# EAGLE board lpc1788_board (EAGLE 6.4)
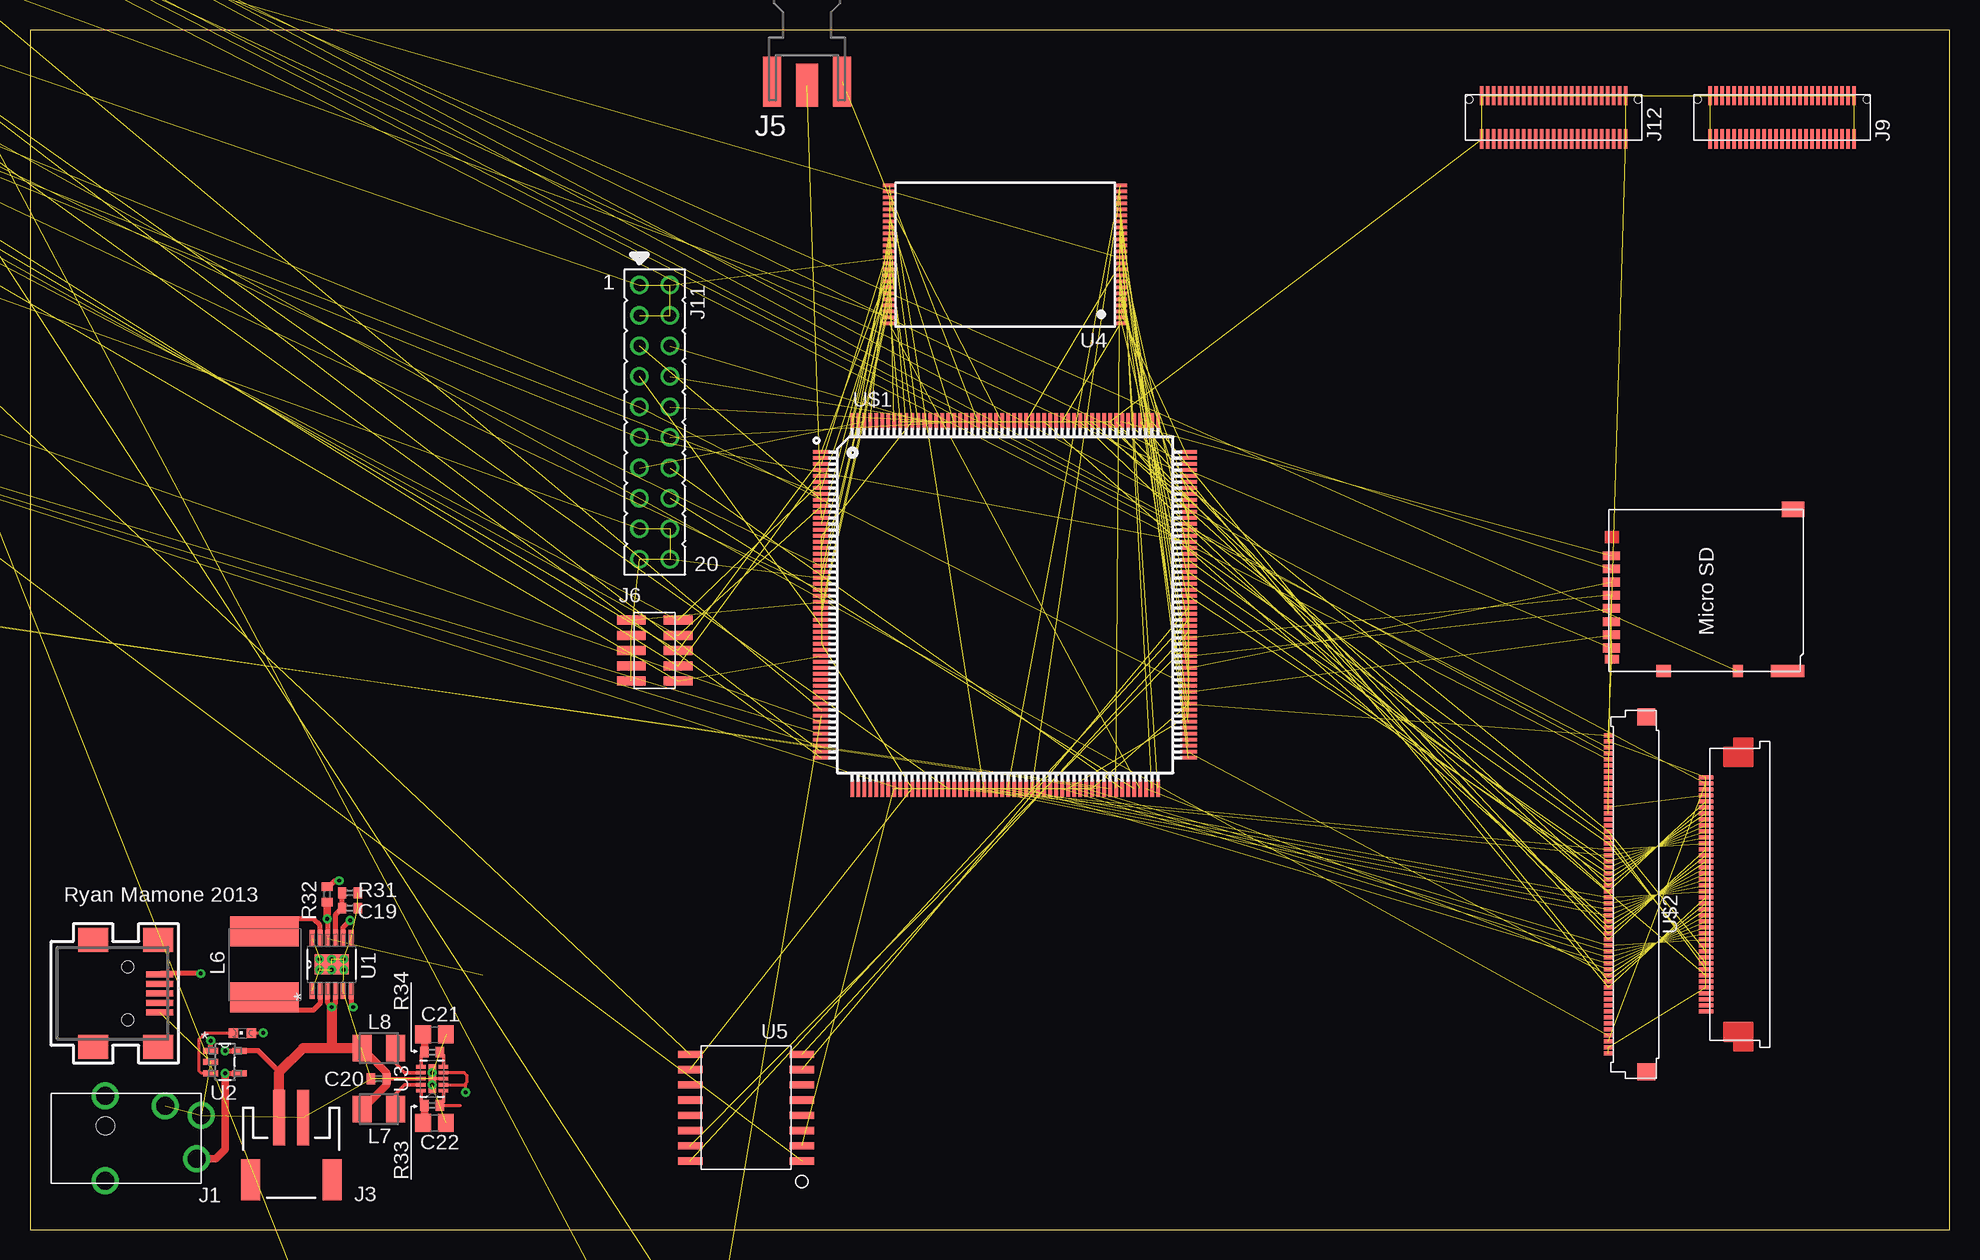
[diagram p0: board, top side]
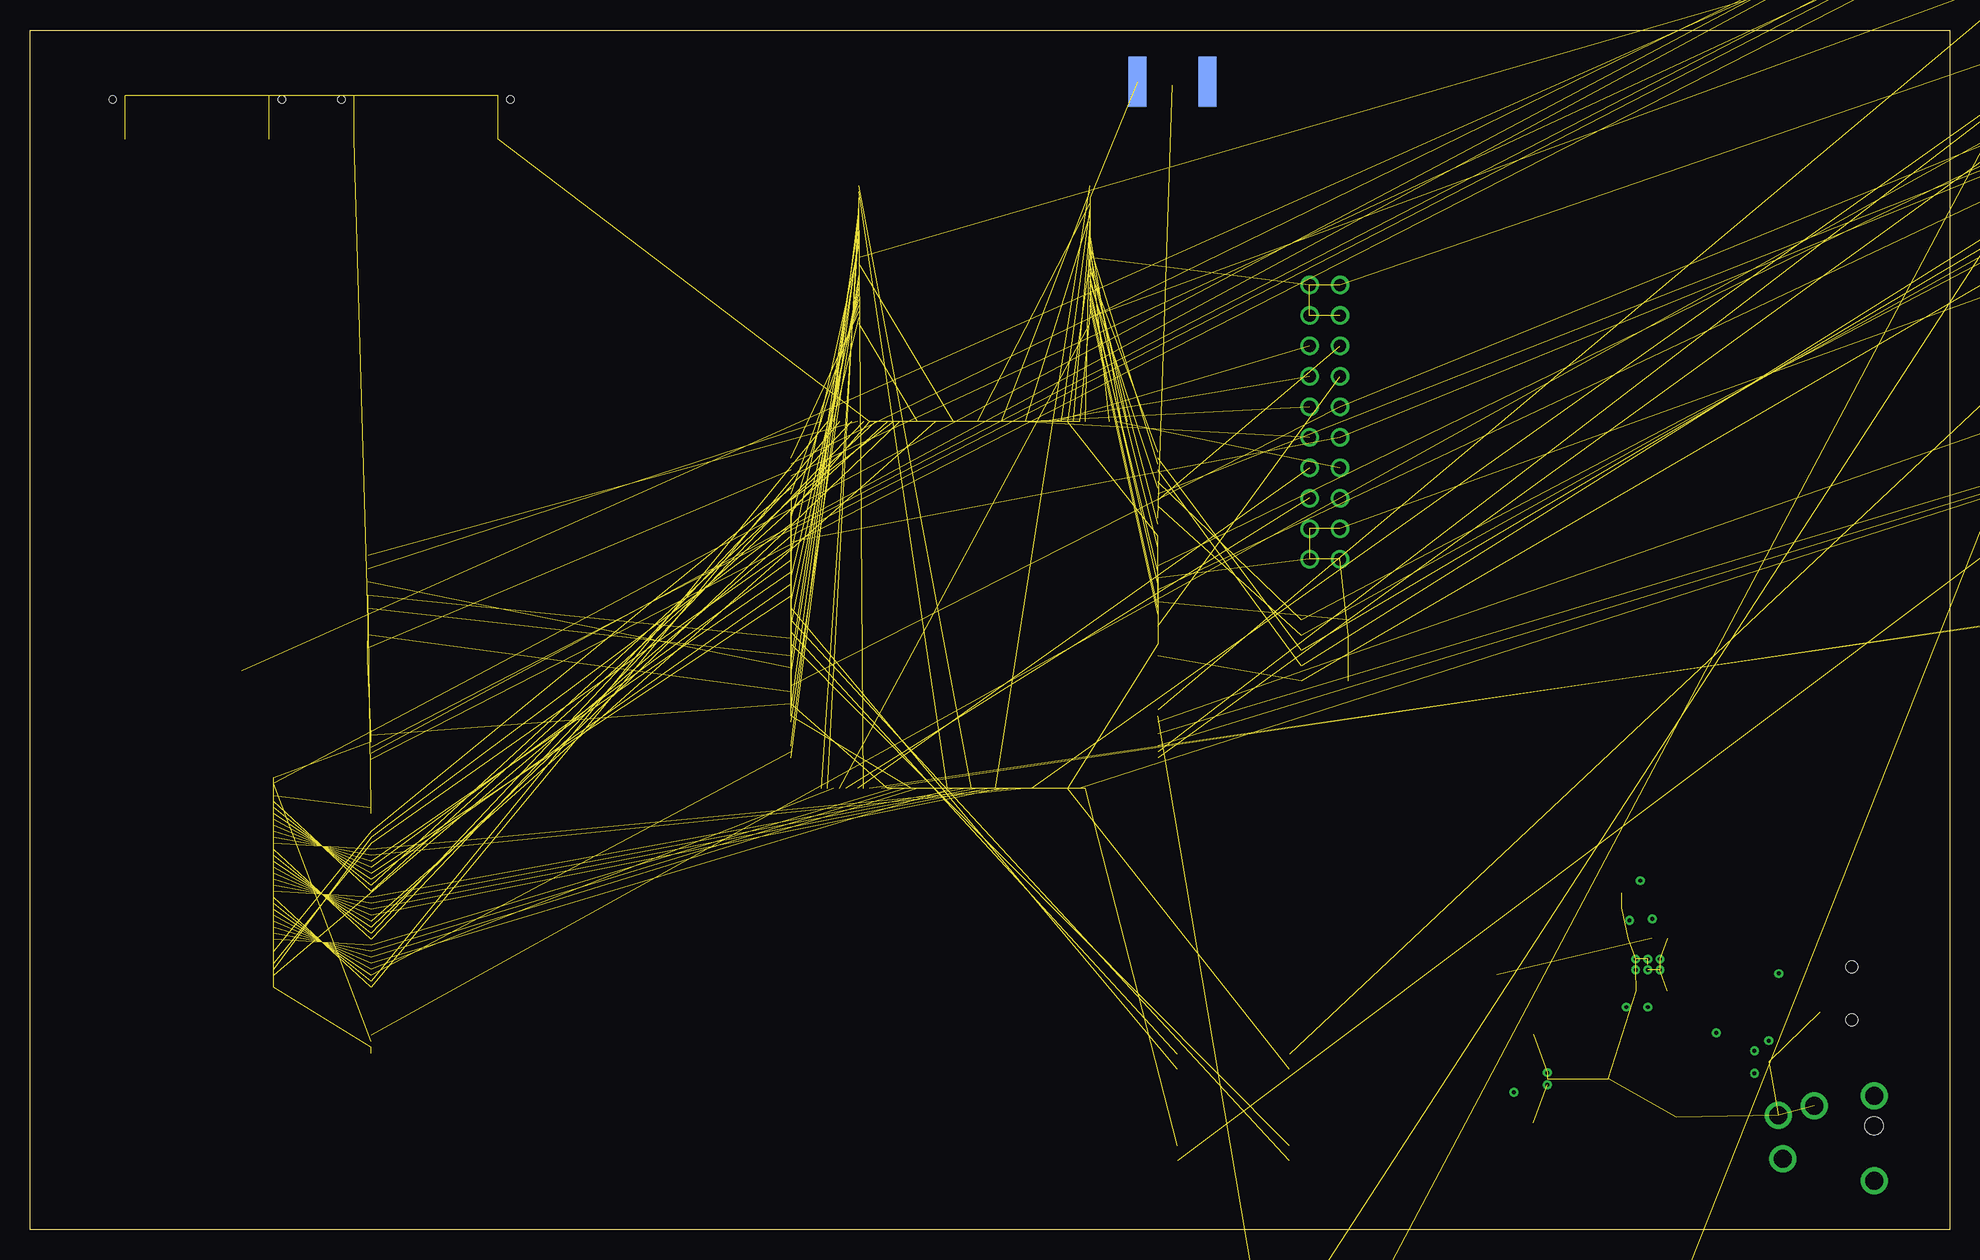
[diagram p1: board, bottom side, seen from below]

Size 160 x 100 mm. Coordinates in mm from the lower left corner, seen from the top.
Outline: 0,0 160,0 160,100 0,100 0,0
Copper layers (1*16): Top 0.035mm / dielectric 1.5mm / Bottom 0.035mm
Design rules "default": minimum track width 10mil, minimum drill 24mil, track to track 8mil, track to pad 8mil, pad to pad 8mil, via to via 8mil, smd to smd 8mil, copper to edge 40mil, drill to drill 8mil, minimum pad ring 10mil, minimum via ring 8mil, stop-mask expansion 4mil, vias tented up to drill 0mil, thermal gap 10mil

## Footprints (pad centres in the part's own frame; a part is rotated, then mirrored left to right if it is on the bottom)
C0402 = smd 0.7 x 0.9: 1 -0.65,0; 2 0.65,0
C0805 = smd 1.3 x 1.5: 1 -0.95,0; 2 0.95,0
C1206 = smd 1.6 x 1.8: 1 -1.4,0; 2 1.4,0
C0603 = smd 1.1 x 1: 1 -0.85,0; 2 0.85,0
PJ-045 = drill 1.5: 1 1,2.6; 2 -3.4,0; 3 -2.6,3; 4 -4.25,-5; 5 2.85,-5 | hole 1.5: -1.75,-5
MUSB-05-X-B-SM-A = smd 0.5 x 2.25: 1 -1.6,8.545; 2 -0.8,8.545; 3 0,8.545; 4 0.8,8.545; 5 1.6,8.545 | smd 2 x 2.5: 8 -4.45,2.97; 9 4.45,2.97; 10 -4.45,8.42; 11 4.45,8.42 | hole 1: -2.2,5.85; 2.2,5.85
JST_2MM_SMT = smd 1 x 4.6: 1 -1,-2.43; 2 1,-2.43 | smd 1.6 x 3.4: NC1 -3.4,2.77; NC2 3.4,2.77
4-PIN_1.25MM = drill 0.75 pad 1: 1 1.875,0; 2 0.625,0; 3 -0.625,0; 4 -1.875,0
SMA-J-P-X-ST-EM1 = smd 1.8 x 3.6: 1 0,-2.4 | smd 1.5 x 4.2: G@1 2.9,-2.1; G@2 -2.9,-2.1 | smd 1.5 x 4.2 bottom: G@3 2.9,-2.1; G@4 -2.9,-2.1
10-PIN_5X2_.050IN_SMT = smd 2.4 x 0.74: P$1 -1.95,2.54; P$2 1.95,2.54; P$3 -1.95,1.27; P$4 1.95,1.27; P$5 -1.95,0; P$6 1.95,0; P$7 -1.95,-1.27; P$8 1.95,-1.27; P$9 -1.95,-2.54; P$10 1.95,-2.54
8-PIN_SIP_.100IN = drill 1.016: 1 -8.89,0; 2 -6.35,0; 3 -3.81,0; 4 -1.27,0; 5 1.27,0; 6 3.81,0; 7 6.35,0; 8 8.89,0
FCI_62684-402100ALF = smd 0.3 x 1.2: P$1 9.75,0; P$2 9.25,0; P$3 8.75,0; P$4 8.25,0; P$5 7.75,0; P$6 7.25,0; P$7 6.75,0; P$8 6.25,0; P$9 5.75,0; P$10 5.25,0; P$11 4.75,0; P$12 4.25,0; P$13 3.75,0; P$14 3.25,0; P$15 2.75,0; P$16 2.25,0; P$17 1.75,0; P$18 1.25,0; P$19 0.75,0; P$20 0.25,0; P$21 -0.25,0; P$22 -0.75,0; P$23 -1.25,0; P$24 -1.75,0; P$25 -2.25,0; P$26 -2.75,0; P$27 -3.25,0; P$28 -3.75,0; P$29 -4.25,0; P$30 -4.75,0; P$31 -5.25,0; P$32 -5.75,0; P$33 -6.25,0; P$34 -6.75,0; P$35 -7.25,0; P$36 -7.75,0; P$37 -8.25,0; P$38 -8.75,0; P$39 -9.25,0; P$40 -9.75,0
DF12B-50DX_25X2_0.5MM = smd 0.3 x 1.6: P$1 -6,-1.8; P$2 -6,1.8; P$3 -5.5,-1.8; P$4 -5.5,1.8; P$5 -5,-1.8; P$6 -5,1.8; P$7 -4.5,-1.8; P$8 -4.5,1.8; P$9 -4,-1.8; P$10 -4,1.8; P$11 -3.5,-1.8; P$12 -3.5,1.8; P$13 -3,-1.8; P$14 -3,1.8; P$15 -2.5,-1.8; P$16 -2.5,1.8; P$17 -2,-1.8; P$18 -2,1.8; P$19 -1.5,-1.8; P$20 -1.5,1.8; P$21 -1,-1.8; P$22 -1,1.8; P$23 -0.5,-1.8; P$24 -0.5,1.8; P$25 0,-1.8; P$26 0,1.8; P$27 0.5,-1.8; P$28 0.5,1.8; P$29 1,-1.8; P$30 1,1.8; P$31 1.5,-1.8; P$32 1.5,1.8; P$33 2,-1.8; P$34 2,1.8; P$35 2.5,-1.8; P$36 2.5,1.8; P$37 3,-1.8; P$38 3,1.8; P$39 3.5,-1.8; P$40 3.5,1.8; P$41 4,-1.8; P$42 4,1.8; P$43 4.5,-1.8; P$44 4.5,1.8; P$45 5,-1.8; P$46 5,1.8; P$47 5.5,-1.8; P$48 5.5,1.8; P$49 6,-1.8; P$50 6,1.8 | hole 0.6: -7.05,1.5; 7.05,1.5
MOLEX_527930570 = smd 0.6 x 1.9: P$1 -2,0; P$2 -1,0; P$3 0,0; P$4 1,0; P$5 2,0
20-PIN_10X2_.100IN = drill 1.016: 1 -8.89,-2.54; 2 -8.89,0; 3 -6.35,-2.54; 4 -6.35,0; 5 -3.81,-2.54; 6 -3.81,0; 7 -1.27,-2.54; 8 -1.27,0; 9 1.27,-2.54; 10 1.27,0; 11 3.81,-2.54; 12 3.81,0; 13 6.35,-2.54; 14 6.35,0; 15 8.89,-2.54; 16 8.89,0; 17 11.43,-2.54; 18 11.43,0; 19 13.97,-2.54; 20 13.97,0
RESISTOR_JUMPER_0402 = smd 0.7 x 0.9: 1 -0.65,0; 2 0.65,0; 3 1.95,0
NR6028 = smd 2.5 x 5.7: 1 -2.75,0; 2 2.75,0
L3225M = smd 1.6 x 2.2: 1 -1.4,0; 2 1.4,0
0603 = smd 1 x 1.1: 1 -0.85,0; 2 0.85,0
CHIPLED_0603 = smd 0.8 x 0.8: A 0,-0.75; C 0,0.75
SOT23 = smd 1 x 1.4: 1 -0.95,-1.1; 2 0.95,-1.1; 3 0,1.1
R0402 = smd 0.7 x 0.9: 1 -0.65,0; 2 0.65,0
R0603 = smd 1 x 1.1: 1 -0.85,0; 2 0.85,0
SMT_PUSHBUTTON = smd 2 x 1.1: P$1 -3.2,1.85; P$2 3.2,1.85; P$3 -3.2,-1.85; P$4 3.2,-1.85
SOP65P490X110-13N = smd 1.397 x 0.432: 1 -2.184,1.626; 2 -2.184,0.965; 3 -2.184,0.33; 4 -2.184,-0.33; 5 -2.184,-0.965; 6 -2.184,-1.626; 7 2.184,-1.626; 8 2.184,-0.965; 9 2.184,-0.33; 10 2.184,0.33; 11 2.184,0.965; 12 2.184,1.626 | smd 1.651 x 2.845: 13 0,0
SOT95P275X110-5N = smd 1.219 x 0.508: 1 -1.194,0.94; 2 -1.194,0; 3 -1.194,-0.94; 4 1.194,-0.94; 5 1.194,0.94
DFN300X200X80-11N = smd 0.813 x 0.305: 1 -0.94,0.991; 2 -0.94,0.508; 3 -0.94,0; 4 -0.94,-0.508; 5 -0.94,-0.991; 6 0.94,-0.991; 7 0.94,-0.508; 8 0.94,0; 9 0.94,0.508; 10 0.94,0.991 | smd 0.635 x 2.388: 11 0,0
TSOP48 = smd 1.1 x 0.3: 1 -9.625,5.75; 2 -9.625,5.25; 3 -9.625,4.75; 4 -9.625,4.25; 5 -9.625,3.75; 6 -9.625,3.25; 7 -9.625,2.75; 8 -9.625,2.25; 9 -9.625,1.75; 10 -9.625,1.25; 11 -9.625,0.75; 12 -9.625,0.25; 13 -9.625,-0.25; 14 -9.625,-0.75; 15 -9.625,-1.25; 16 -9.625,-1.75; 17 -9.625,-2.25; 18 -9.625,-2.75; 19 -9.625,-3.25; 20 -9.625,-3.75; 21 -9.625,-4.25; 22 -9.625,-4.75; 23 -9.625,-5.25; 24 -9.625,-5.75; 25 9.625,-5.75; 26 9.625,-5.25; 27 9.625,-4.75; 28 9.625,-4.25; 29 9.625,-3.75; 30 9.625,-3.25; 31 9.625,-2.75; 32 9.625,-2.25; 33 9.625,-1.75; 34 9.625,-1.25; 35 9.625,-0.75; 36 9.625,-0.25; 37 9.625,0.25; 38 9.625,0.75; 39 9.625,1.25; 40 9.625,1.75; 41 9.625,2.25; 42 9.625,2.75; 43 9.625,3.25; 44 9.625,3.75; 45 9.625,4.25; 46 9.625,4.75; 47 9.625,5.25; 48 9.625,5.75
SO3_016 = smd 0.6 x 2.05: P$1 -4.445,-4.65; P$2 -3.175,-4.65; P$3 -1.905,-4.65; P$4 -0.635,-4.65; P$5 0.635,-4.65; P$6 1.905,-4.65; P$7 3.175,-4.65; P$8 4.445,-4.65; P$9 4.445,4.65; P$10 3.175,4.65; P$11 1.905,4.65; P$12 0.635,4.65; P$13 -0.635,4.65; P$14 -1.905,4.65; P$15 -3.175,4.65; P$16 -4.445,4.65
LQFP208 = smd 1.4 x 0.29: 1 -15.3,12.75; 2 -15.3,12.25; 3 -15.3,11.75; 4 -15.3,11.25; 5 -15.3,10.75; 6 -15.3,10.25; 7 -15.3,9.75; 8 -15.3,9.25; 9 -15.3,8.75; 10 -15.3,8.25; 11 -15.3,7.75; 12 -15.3,7.25; 13 -15.3,6.75; 14 -15.3,6.25; 15 -15.3,5.75; 16 -15.3,5.25; 17 -15.3,4.75; 18 -15.3,4.25; 19 -15.3,3.75; 20 -15.3,3.25; 21 -15.3,2.75; 22 -15.3,2.25; 23 -15.3,1.75; 24 -15.3,1.25; 25 -15.3,0.75; 26 -15.3,0.25; 27 -15.3,-0.25; 28 -15.3,-0.75; 29 -15.3,-1.25; 30 -15.3,-1.75; 31 -15.3,-2.25; 32 -15.3,-2.75; 33 -15.3,-3.25; 34 -15.3,-3.75; 35 -15.3,-4.25; 36 -15.3,-4.75; 37 -15.3,-5.25; 38 -15.3,-5.75; 39 -15.3,-6.25; 40 -15.3,-6.75; 41 -15.3,-7.25; 42 -15.3,-7.75; 43 -15.3,-8.25; 44 -15.3,-8.75; 45 -15.3,-9.25; 46 -15.3,-9.75; 47 -15.3,-10.25; 48 -15.3,-10.75; 49 -15.3,-11.25; 50 -15.3,-11.75; 51 -15.3,-12.25; 52 -15.3,-12.75; 105 15.3,-12.75; 106 15.3,-12.25; 107 15.3,-11.75; 108 15.3,-11.25; 109 15.3,-10.75; 110 15.3,-10.25; 111 15.3,-9.75; 112 15.3,-9.25; 113 15.3,-8.75; 114 15.3,-8.25; 115 15.3,-7.75; 116 15.3,-7.25; 117 15.3,-6.75; 118 15.3,-6.25; 119 15.3,-5.75; 120 15.3,-5.25; 121 15.3,-4.75; 122 15.3,-4.25; 123 15.3,-3.75; 124 15.3,-3.25; 125 15.3,-2.75; 126 15.3,-2.25; 127 15.3,-1.75; 128 15.3,-1.25; 129 15.3,-0.75; 130 15.3,-0.25; 131 15.3,0.25; 132 15.3,0.75; 133 15.3,1.25; 134 15.3,1.75; 135 15.3,2.25; 136 15.3,2.75; 137 15.3,3.25; 138 15.3,3.75; 139 15.3,4.25; 140 15.3,4.75; 141 15.3,5.25; 142 15.3,5.75; 143 15.3,6.25; 144 15.3,6.75; 145 15.3,7.25; 146 15.3,7.75; 147 15.3,8.25; 148 15.3,8.75; 149 15.3,9.25; 150 15.3,9.75; 151 15.3,10.25; 152 15.3,10.75; 153 15.3,11.25; 154 15.3,11.75; 155 15.3,12.25; 156 15.3,12.75 | smd 0.29 x 1.4: 53 -12.75,-15.3; 54 -12.25,-15.3; 55 -11.75,-15.3; 56 -11.25,-15.3; 57 -10.75,-15.3; 58 -10.25,-15.3; 59 -9.75,-15.3; 60 -9.25,-15.3; 61 -8.75,-15.3; 62 -8.25,-15.3; 63 -7.75,-15.3; 64 -7.25,-15.3; 65 -6.75,-15.3; 66 -6.25,-15.3; 67 -5.75,-15.3; 68 -5.25,-15.3; 69 -4.75,-15.3; 70 -4.25,-15.3; 71 -3.75,-15.3; 72 -3.25,-15.3; 73 -2.75,-15.3; 74 -2.25,-15.3; 75 -1.75,-15.3; 76 -1.25,-15.3; 77 -0.75,-15.3; 78 -0.25,-15.3; 79 0.25,-15.3; 80 0.75,-15.3; 81 1.25,-15.3; 82 1.75,-15.3; 83 2.25,-15.3; 84 2.75,-15.3; 85 3.25,-15.3; 86 3.75,-15.3; 87 4.25,-15.3; 88 4.75,-15.3; 89 5.25,-15.3; 90 5.75,-15.3; 91 6.25,-15.3; 92 6.75,-15.3; 93 7.25,-15.3; 94 7.75,-15.3; 95 8.25,-15.3; 96 8.75,-15.3; 97 9.25,-15.3; 98 9.75,-15.3; 99 10.25,-15.3; 100 10.75,-15.3; 101 11.25,-15.3; 102 11.75,-15.3; 103 12.25,-15.3; 104 12.75,-15.3; 157 12.75,15.3; 158 12.25,15.3; 159 11.75,15.3; 160 11.25,15.3; 161 10.75,15.3; 162 10.25,15.3; 163 9.75,15.3; 164 9.25,15.3; 165 8.75,15.3; 166 8.25,15.3; 167 7.75,15.3; 168 7.25,15.3; 169 6.75,15.3; 170 6.25,15.3; 171 5.75,15.3; 172 5.25,15.3; 173 4.75,15.3; 174 4.25,15.3; 175 3.75,15.3; 176 3.25,15.3; 177 2.75,15.3; 178 2.25,15.3; 179 1.75,15.3; 180 1.25,15.3; 181 0.75,15.3; 182 0.25,15.3; 183 -0.25,15.3; 184 -0.75,15.3; 185 -1.25,15.3; 186 -1.75,15.3; 187 -2.25,15.3; 188 -2.75,15.3; 189 -3.25,15.3; 190 -3.75,15.3; 191 -4.25,15.3; 192 -4.75,15.3; 193 -5.25,15.3; 194 -5.75,15.3; 195 -6.25,15.3; 196 -6.75,15.3; 197 -7.25,15.3; 198 -7.75,15.3; 199 -8.25,15.3; 200 -8.75,15.3; 201 -9.25,15.3; 202 -9.75,15.3; 203 -10.25,15.3; 204 -10.75,15.3; 205 -11.25,15.3; 206 -11.75,15.3; 207 -12.25,15.3; 208 -12.75,15.3
MOLEX_51296-5494 = smd 0.3 x 0.8: P$1 -13.25,0.5; P$2 -12.75,0.5; P$3 -12.25,0.5; P$4 -11.75,0.5; P$5 -11.25,0.5; P$6 -10.75,0.5; P$7 -10.25,0.5; P$8 -9.75,0.5; P$9 -9.25,0.5; P$10 -8.75,0.5; P$11 -8.25,0.5; P$12 -7.75,0.5; P$13 -7.25,0.5; P$14 -6.75,0.5; P$15 -6.25,0.5; P$16 -5.75,0.5; P$17 -5.25,0.5; P$18 -4.75,0.5; P$19 -4.25,0.5; P$20 -3.75,0.5; P$21 -3.25,0.5; P$22 -2.75,0.5; P$23 -2.25,0.5; P$24 -1.75,0.5; P$25 -1.25,0.5; P$26 -0.75,0.5; P$27 -0.25,0.5; P$28 0.25,0.5; P$29 0.75,0.5; P$30 1.25,0.5; P$31 1.75,0.5; P$32 2.25,0.5; P$33 2.75,0.5; P$34 3.25,0.5; P$35 3.75,0.5; P$36 4.25,0.5; P$37 4.75,0.5; P$38 5.25,0.5; P$39 5.75,0.5; P$40 6.25,0.5; P$41 6.75,0.5; P$42 7.25,0.5; P$43 7.75,0.5; P$44 8.25,0.5; P$45 8.75,0.5; P$46 9.25,0.5; P$47 9.75,0.5; P$48 10.25,0.5; P$49 10.75,0.5; P$50 11.25,0.5; P$51 11.75,0.5; P$52 12.25,0.5; P$53 12.75,0.5; P$54 13.25,0.5 | smd 1.4 x 1.5: P$100 -14.8,-2.65; P$101 14.8,-2.65
DM3AT = smd 1 x 1.2: CASE -6.785,2.28 | smd 1 x 2.8: CASE@1 -6.785,-8.07 | smd 1.3 x 1.9: CASE@2 6.715,-8.52 | smd 0.711 x 1.422: CD/DAT3 1.74,6.63; CLK -1.56,6.63; CMD 0.64,6.63; DAT0 -3.76,6.63; DAT1 -4.86,6.63; DAT2 2.84,6.63; VDD -0.46,6.63; VSS -2.66,6.63 | smd 1 x 0.8: DET_A -6.785,-3.92 | smd 0.7 x 1.2: DET_B -5.81,6.58
SC-88 = smd 0.5 x 0.4: P$1 -0.95,0.65; P$2 -0.95,0; P$3 -0.95,-0.65; P$4 0.95,-0.65; P$5 0.95,0; P$6 0.95,0.65
2-SMD_8MMX4.5MM = smd 3 x 3: 1 -3.5,0; 2 3.5,0

## Placement (x,y rotation side)
C1  10uF  [C0402]  -24.13,114.3 0 top  (outside the outline)
C2  100pF  [C0402]  -60.96,109.22 0 top  (outside the outline)
C3  1uF  [C0402]  -92.71,119.38 0 top  (outside the outline)
C4  22uF  [C0805]  -31.75,102.87 0 top  (outside the outline)
C5  1uF  [C0402]  -97.79,119.38 0 top  (outside the outline)
C6  100uF  [C1206]  -17.78,102.87 0 top  (outside the outline)
C7  1uF  [C0402]  -16.51,124.46 0 top  (outside the outline)
C8  330uF  [C1206]  -25.4,102.87 0 top  (outside the outline)
C9  1uF  [C0805]  -41.91,102.87 0 top  (outside the outline)
C10  1uF  [C0402]  -97.79,114.3 0 top  (outside the outline)
C11  1uF  [C0805]  -36.83,102.87 0 top  (outside the outline)
C12  18pF  [C0603]  -95.25,109.22 0 top  (outside the outline)
C13  18pF  [C0603]  -17.78,114.3 0 top  (outside the outline)
C14  100nF  [C0402]  -68.58,109.22 0 top  (outside the outline)
C15  100nF  [C0402]  -76.2,109.22 0 top  (outside the outline)
C16  .1uF  [C0603]  -92.71,114.3 0 top  (outside the outline)
C17  18pF  [C0402]  -30.48,114.3 0 top  (outside the outline)
C18  18pF  [C0402]  -36.83,114.3 0 top  (outside the outline)
C19  100pF  [C0402]  26.67,26.8 0 top
C20  1uF  [C0402]  29.08,12.57 180 top
C21  1uF  [C0805]  33.72,16.26 0 top
C22  1uF  [C0805]  33.72,8.89 0 top
J1  5VDC  [PJ-045]  11.29,6.91 270 top
J2  SAMTEC_MUSB  [MUSB-05-X-B-SM-A]  2.29,19.68 270 top
J3  JST_2MM_SMT  [JST_2MM_SMT]  21.79,6.91 180 top
J4  Console  [4-PIN_1.25MM]  -48.26,57.15 0 top  (outside the outline)
J5  SMA-J-P-X-ST-EM1  [SMA-J-P-X-ST-EM1]  64.77,97.79 0 top
J6  JTAG  [10-PIN_5X2_.050IN_SMT]  52.07,48.26 0 top
J7  JTAG  [8-PIN_SIP_.100IN]  -24.13,95.25 0 top  (outside the outline)
J8  NHD-4.3-480272EF  [FCI_62684-402100ALF]  139.7,27.94 90 top
J9  DF12B-50DX_25X2_0.5MM  [DF12B-50DX_25X2_0.5MM]  146.05,92.71 0 top
J10  MOLEX_527930570_5PIN_FFC_CONNECTOR  [MOLEX_527930570]  -71.12,82.55 0 top  (outside the outline)
J11  20PIN_10X2_.100IN  [20-PIN_10X2_.100IN]  53.34,69.85 270 top
J12  DF12B-50DX_25X2_0.5MM  [DF12B-50DX_25X2_0.5MM]  127,92.71 0 top
JP1  RESISTOR_JUMPER_0402  [RESISTOR_JUMPER_0402]  -36.83,109.22 0 top  (outside the outline)
L1  4.7uH  [NR6028]  -57.15,74.93 0 top  (outside the outline)
L2  15uH  [L3225M]  31.75,-8.89 0 top  (outside the outline)
L3  15uH  [L3225M]  25.4,-8.89 0 top  (outside the outline)
L4  470nH  [0603]  -45.72,109.22 0 top  (outside the outline)
L5  470nH  [0603]  -53.34,109.22 0 top  (outside the outline)
L6  4.7uH  [NR6028]  19.56,22.1 270 top
L7  15uH  [L3225M]  29.08,10.03 0 top
L8  15uH  [L3225M]  29.08,15.11 0 top
LED1  CHG  [CHIPLED_0603]  50.8,-10.16 0 top  (outside the outline)
LED2  CHG  [CHIPLED_0603]  57.15,-10.16 0 top  (outside the outline)
LED3  CHG  [CHIPLED_0603]  17.72,16.38 90 top
Q1  MMBT2907  [SOT23]  -44.45,124.46 0 top  (outside the outline)
R1  320k  [R0402]  -43.18,114.3 0 top  (outside the outline)
R2  182k  [R0402]  -49.53,114.3 0 top  (outside the outline)
R3  32.4k  [R0402]  -82.55,109.22 0 top  (outside the outline)
R4  50  [R0402]  -20.32,124.46 0 top  (outside the outline)
R5  499k  [R0402]  -55.88,114.3 0 top  (outside the outline)
R6  10  [R0402]  -24.13,124.46 0 top  (outside the outline)
R7  10  [R0402]  -27.94,124.46 0 top  (outside the outline)
R8  0  [R0402]  -31.75,124.46 0 top  (outside the outline)
R9  0  [R0402]  -35.56,124.46 0 top  (outside the outline)
R10  0  [R0402]  -16.51,119.38 0 top  (outside the outline)
R11  100K  [R0603]  -88.9,109.22 0 top  (outside the outline)
R12  4.7K  [R0603]  -62.23,114.3 0 top  (outside the outline)
R13  4.7K  [R0603]  -68.58,114.3 0 top  (outside the outline)
R14  10k  [R0402]  -21.59,119.38 0 top  (outside the outline)
R15  1.5K  [R0603]  -74.93,114.3 0 top  (outside the outline)
R16  50  [R0402]  -26.67,119.38 0 top  (outside the outline)
R17  33  [R0402]  -31.75,119.38 0 top  (outside the outline)
R18  33  [R0402]  -36.83,119.38 0 top  (outside the outline)
R19  10k  [R0402]  -41.91,119.38 0 top  (outside the outline)
R20  10k  [R0402]  -46.99,119.38 0 top  (outside the outline)
R21  0  [R0603]  -52.07,119.38 0 top  (outside the outline)
R22  10k  [R0402]  -57.15,119.38 0 top  (outside the outline)
R23  10K  [R0603]  -62.23,119.38 0 top  (outside the outline)
R24  10K  [R0603]  -67.31,119.38 0 top  (outside the outline)
R25  10K  [R0603]  -72.39,119.38 0 top  (outside the outline)
R26  10K  [R0603]  -77.47,119.38 0 top  (outside the outline)
R27  10K  [R0603]  -82.55,119.38 0 top  (outside the outline)
R28  10k  [R0402]  -87.63,119.38 0 top  (outside the outline)
R29  4.7K  [R0603]  -81.28,114.3 0 top  (outside the outline)
R30  4.7K  [R0603]  -87.63,114.3 0 top  (outside the outline)
R31  499k  [R0402]  26.67,28.07 180 top
R32  320k  [R0402]  24.77,27.94 270 top
R33  10  [R0402]  33.53,10.35 180 top
R34  10  [R0402]  33.53,14.8 180 top
SW1  Reset  [SMT_PUSHBUTTON]  -17.78,83.82 0 top  (outside the outline)
U1  LTC3127EMSEPBF  [SOP65P490X110-13N]  25.15,22.1 90 top
U2  MAX1551EZK+T  [SOT95P275X110-5N]  16.26,13.97 0 top
U3  LT3497EDDBTRMPBF  [DFN300X200X80-11N]  33.53,12.57 180 top
U4  CY62167_16MBIT_SRAM  [TSOP48]  81.28,81.28 180 top
U5  S25FL064P  [SO3_016]  59.69,10.16 90 top
U$1  LPC177X_8X-208  [LQFP208]  81.28,52.07 0 top
U$2  NHD-3.5-320240MF  [MOLEX_51296-5494]  132.08,27.94 90 top
U$3  DM3AT  [DM3AT]  138.43,53.34 90 top
U$4  NUP2202  [SC-88]  -40.64,125.73 0 top  (outside the outline)
X1  12MHz  [2-SMD_8MMX4.5MM]  -59.69,85.09 0 top  (outside the outline)

## Library data of the parts
C1-C22 L2 L3 L7 L8 R1-R34 = rcl
J1-J12 JP1 L1 L4-L6 SW1 U4 U5 U$2 U$4 = Custom
LED1-LED3 = led
Q1 = SparkFun-DiscreteSemi; PROD_ID: TRANS-09245
U1 = LTC; MANUFACTURER: LTC3127EMSE#PBF; OC_FARNELL: 1801165; OC_NEWARK: 67R4282; PACKAGE: MSOP-12; SUPPLIER: Linear Technology
U2 = Maxim; MPN: MAX1551EZK+T; OC_FARNELL: 1628221; OC_NEWARK: 59J2760; PACKAGE: SOT-23-5; SUPPLIER: Maxim
U3 = LTC; MPN: LT3497EDDB#TRMPBF; OC_FARNELL: 1715222; OC_NEWARK: 88M1943; PACKAGE: DFN-10; SUPPLIER: Linear Technology
U$1 = lpc177x-lpc178x
U$3 = HIROSE-DM3AT
X1 = Custom; DIGIKEY: 535-10875-1-ND

## Nets
!BLS0: U4.15 U$1.119
!BLS1: U4.14 U$1.139
!CS0: U4.26 U$1.187
!CS1: U$1.193
!OE: U4.28 U$1.183
!WE: U4.11 U$1.179
+3V1: R32.2 U1.10
+3V3: C4.1 C6.1 C8.1 J4.1 J6.P$1 J8.P$4 J9.P$1 J9.P$2 J10.P$1 J11.1 J11.2 J11.3 J11.4 J12.P$1 J12.P$2 L4.1 L5.1 Q1.2 R1.2 R11.2 R12.1 R13.1 R14.1 R16.2 R19.1 R20.1 R21.2 R22.1 R23.1 R25.1 R26.1 R27.1 R28.1 R29.1 R30.1 U4.37 U5.P$2 U$1.15 U$1.26 U$1.60 U$1.71 U$1.86 U$1.89 U$1.112 U$1.125 U$1.146 U$1.165 U$1.174 U$1.181 U$1.198 U$2.P$41 U$2.P$42 U$3.VDD
+VBAT: C1.1 C7.1 C10.1 L2.1 L3.1 R4.2
+VBAT1: C20.1 J3.2 L7.1 L8.1 U1.3 U1.4 U2.5 U3.8
+VUSB: C5.1 U$4.P$5
+VUSB1: J2.1 U2.1
/RESET: C16.1 J6.P$10 J7.6 R11.1 SW1.P$1 SW1.P$2 U$1.35
A0: U4.25 U$1.75
A1: U4.24 U$1.79
A2: U4.23 U$1.83
A3: U4.22 U$1.97
A4: U4.21 U$1.103
A5: U4.20 U$1.107
A6: U4.19 U$1.113
A7: U4.18 U$1.121
A8: U4.8 U$1.127
A9: U4.7 U$1.131
A10: U4.6 U$1.135
A11: U4.5 U$1.145
A12: U4.4 U$1.149
A13: U4.3 U$1.155
A14: U4.2 U$1.159
A15: U4.1 U$1.173
A16: U4.48 U$1.101
A17: U4.17 U$1.104
A18: U4.16 U$1.105
A19: U4.9 U$1.111
B0: J8.P$21 U$1.160 U$2.P$12
B1: J8.P$22 U$1.158 U$2.P$13
B2: J8.P$23 U$1.106 U$2.P$14
B3: J8.P$24 U$1.102 U$2.P$15
B4: J8.P$25 U$1.82 U$2.P$16
B5: J8.P$26 U$1.88 U$2.P$17
B6: J8.P$27 U$1.90 U$2.P$18
B7: J8.P$28 U$1.92 U$2.P$19
D0: U4.29 U$1.197
D1: U4.31 U$1.201
D2: U4.33 U$1.207
D3: U4.35 U$1.3
D4: U4.38 U$1.13
D5: U4.40 U$1.17
D6: U4.42 U$1.23
D7: U4.44 U$1.27
D8: U4.30 U$1.191
D9: U4.32 U$1.199
D10: U4.34 U$1.205
D11: U4.36 U$1.208
D12: U4.39 U$1.1
D13: U4.41 U$1.7
D14: U4.43 U$1.21
D15: U4.45 U$1.28
EXT_UART_RX: J11.16 U$1.100
EXT_UART_TX: J11.14 U$1.98
G0: J8.P$13 U$1.164 U$2.P$20
G1: J8.P$14 U$1.162 U$2.P$21
G2: J8.P$15 U$1.170 U$2.P$22
G3: J8.P$16 U$1.176 U$2.P$23
G4: J8.P$17 U$1.74 U$2.P$24
G5: J8.P$18 U$1.76 U$2.P$25
G6: J8.P$19 U$1.78 U$2.P$26
G7: J8.P$20 U$1.80 U$2.P$27
GND: C1.2 C2.2 C3.2 C4.2 C5.2 C6.2 C7.2 C8.2 C9.2 C10.2 C11.2 C12.2 C13.2 C14.2 C15.2 C16.2 C17.2 C18.2 J4.2 J5.G@1 J6.P$3 J6.P$5 J6.P$9 J7.8 J8.P$1 J8.P$3 J8.P$29 J8.P$36 J9.P$49 J9.P$50 J10.P$5 J11.17 J11.18 J11.19 J11.20 J12.P$49 J12.P$50 R2.1 R3.1 R5.1 R24.2 SW1.P$3 SW1.P$4 U4.27 U4.46 U5.P$10 U$1.22 U$1.32 U$1.33 U$1.63 U$1.77 U$1.84 U$1.93 U$1.114 U$1.133 U$1.148 U$1.169 U$1.172 U$1.189 U$1.200 U$2.P$1 U$2.P$2 U$2.P$53 U$2.P$54 U$3.DET_B U$3.VSS U$4.P$2
GND1: C19.2 C20.2 C21.2 C22.2 J1.2 J1.3 J2.5 J3.1 R31.1 U1.1 U1.5 U1.7 U1.12 U1.13 U2.2 U3.3 U3.11
KEY_I2C_SCL: J10.P$3 R30.2 U$1.48
KEY_I2C_SDA: J10.P$2 R29.2 U$1.50
KEY_INT: J10.P$4 U$1.61
LCD_DCLK: J8.P$30 U$1.150 U$2.P$38
LCD_ENAB_M: J8.P$34 R8.1 U$1.142
LCD_FP: J8.P$33 U$1.144 U$2.P$37
LCD_LE: R9.1 U$1.152
LCD_LP: J8.P$32 U$1.140 U$2.P$36
LCD_PWR: R10.1 U$1.154
LED1_PWR: J8.P$2 JP1.1 R6.1 U$2.P$3
LED2_PWR: JP1.3 R7.1
LED+1: JP1.2 U$2.P$4
LED_CTRL: U$1.185
N$1: R3.2
N$2: R1.1 R2.2
N$3: L1.2
N$4: L1.1
N$5: LED1.C
N$6: C9.1 R6.2
N$7: C2.1 R5.2
N$8: LED1.A R4.1
N$9: R8.2 U$2.P$52
N$10: R9.2 U$2.P$50
N$11: C11.1 R7.2
N$12: L2.2
N$13: L3.2
N$14: R10.2 U$2.P$51
N$15: C12.1 U$1.46 X1.2
N$16: C13.1 U$1.44 X1.1
N$17: C14.1 L4.2 U$1.20
N$18: C15.1 L5.2 U$1.24
N$19: R18.1 U$4.P$6
N$20: R17.1 U$4.P$1
N$21: Q1.3 R15.2
N$22: Q1.1 U$1.69
N$23: LED2.A R16.1
N$24: LED2.C U$1.45
N$25: J4.3 U$1.94
N$26: J4.4 U$1.96
N$27: J5.1 U$1.12
N$28: R19.2 U4.12
N$29: R20.2 U4.47
N$30: J11.13 U$1.206
N$31: R22.2 U5.P$9
N$32: J11.7 U$1.30
N$33: R28.2 U5.P$1
N$34: J11.5 U$1.9
N$35: U1.6
N$36: J7.1 R21.1
N$37: R32.1 U1.8
N$38: C19.1 R31.2 U1.9
N$39: LED3.A
N$40: LED3.C U2.3
N$41: L6.2 U1.2
N$42: L6.1 U1.11
N$43: C22.1 R33.2 U3.10
N$44: R33.1 U3.1
N$46: C21.1 R34.2 U3.6
N$47: L7.2 U3.9
N$48: L8.2 U3.7
N$49: U3.2 U3.4
R0: J8.P$5 U$1.168 U$2.P$28
R1: J8.P$6 U$1.166 U$2.P$29
R2: J8.P$7 U$1.134 U$2.P$30
R3: J8.P$8 U$1.132 U$2.P$31
R4: J8.P$9 U$1.138 U$2.P$32
R5: J8.P$10 U$1.136 U$2.P$33
R6: J8.P$11 U$1.70 U$2.P$34
R7: J8.P$12 U$1.72 U$2.P$35
S$1: R34.1 U3.5
SCL: J11.11 R13.2 U$1.141
SD_CLK: U$1.122 U$3.CLK
SD_CMD: U$1.120 U$3.CMD
SD_DAT_0: U$1.116 U$3.DAT0
SD_DAT_1: U$1.153 U$3.DAT1
SD_DAT_2: U$1.163 U$3.DAT2
SD_DAT_3: U$1.157 U$3.CD/DAT3
SD_DET: R14.2 U$3.DET_A
SDA: J11.9 R12.2 U$1.117
SPI_CS: J11.12 U$1.190
SPI_FLASH_CS: U5.P$7 U$1.130
SPI_FLASH_MISO: U5.P$8 U$1.126
SPI_FLASH_MOSI: U5.P$15 U$1.124
SPI_FLASH_SCK: U5.P$16 U$1.128
SPI_MISO: J11.10 U$1.192
SPI_MOSI: J11.8 U$1.194
SPI_SCK: J11.6 U$1.196
TCK/SWDCLK: J6.P$4 J7.3 R24.1 U$1.10
TDI: J6.P$8 J7.5 R26.2 U$1.4
TDO/SWO: J6.P$6 J7.4 R25.2 U$1.2
TMS/SWDIO: J6.P$2 J7.2 R23.2 U$1.6
TRST: R27.2 U$1.8
USB_D+: C17.1 R15.1 R17.2 U$1.51
USB_D-: C18.1 R18.2 U$1.52
V+: C3.1
V+1: J1.1 U2.4

## Tracks (layer width: path | path; a pad name or v marks a point on that pad's centre or on a via)
!BLS0  (1 unrouted)
!BLS1  (1 unrouted)
!CS0  (1 unrouted)
!OE  (1 unrouted)
!WE  (1 unrouted)
+3V1  (via drill 0.33)  (1 unrouted)
  Top 0.406: v24.77,25.91 24.82,25.86 U1.10
  Top 0.61: R32.2 v24.77,25.91
+3V3  (52 unrouted)
+VBAT  (5 unrouted)
+VBAT1  (via drill 0.33)
  Top 0.305: U3.8 C20.1 | C20.1 29.73,13.06 | C20.1 29.73,12.08
  Top 0.406: v16.26,14.91 U2.5 19.03,14.9 20.79,13.15 | U1.4 25.48,18.87 v25.15,18.54 24.82,18.87 U1.3
  Top 0.61: 29.73,13.06 L8.1 | 29.73,12.08 L7.1
  Top 0.813: J3.2 20.79,13.15 22.75,15.11 25.15,15.11 | v25.15,18.54 25.15,15.11 | L8.1 25.15,15.11
+VUSB  (1 unrouted)
+VUSB1  (via drill 0.33)
  Top 0.406: U2.1 v15.06,15.75 | v14.22,21.34 10.88,21.34 J2.1
/RESET  (6 unrouted)
A0  (1 unrouted)
A1  (1 unrouted)
A2  (1 unrouted)
A3  (1 unrouted)
A4  (1 unrouted)
A5  (1 unrouted)
A6  (1 unrouted)
A7  (1 unrouted)
A8  (1 unrouted)
A9  (1 unrouted)
A10  (1 unrouted)
A11  (1 unrouted)
A12  (1 unrouted)
A13  (1 unrouted)
A14  (1 unrouted)
A15  (1 unrouted)
A16  (1 unrouted)
A17  (1 unrouted)
A18  (1 unrouted)
A19  (1 unrouted)
B0  (2 unrouted)
B1  (2 unrouted)
B2  (2 unrouted)
B3  (2 unrouted)
B4  (2 unrouted)
B5  (2 unrouted)
B6  (2 unrouted)
B7  (2 unrouted)
D0  (1 unrouted)
D1  (1 unrouted)
D2  (1 unrouted)
D3  (1 unrouted)
D4  (1 unrouted)
D5  (1 unrouted)
D6  (1 unrouted)
D7  (1 unrouted)
D8  (1 unrouted)
D9  (1 unrouted)
D10  (1 unrouted)
D11  (1 unrouted)
D12  (1 unrouted)
D13  (1 unrouted)
D14  (1 unrouted)
D15  (1 unrouted)
EXT_UART_RX  (1 unrouted)
EXT_UART_TX  (1 unrouted)
G0  (2 unrouted)
G1  (2 unrouted)
G2  (2 unrouted)
G3  (2 unrouted)
G4  (2 unrouted)
G5  (2 unrouted)
G6  (2 unrouted)
G7  (2 unrouted)
GND  (66 unrouted)
GND1  (via drill 0.33, 0.33 pad 0.25)  (21 unrouted)
  Top 0.254: U3.3 U3.11 v33.53,12.06
  Top 0.61: v25.15,21.65 U1.13
  other vias: 33.53,13.08 25.15,22.54 24.13,21.65 24.13,22.54 26.16,21.65 26.16,22.54
KEY_I2C_SCL  (2 unrouted)
KEY_I2C_SDA  (2 unrouted)
KEY_INT  (1 unrouted)
LCD_DCLK  (2 unrouted)
LCD_ENAB_M  (2 unrouted)
LCD_FP  (2 unrouted)
LCD_LE  (1 unrouted)
LCD_LP  (2 unrouted)
LCD_PWR  (1 unrouted)
LED1_PWR  (3 unrouted)
LED2_PWR  (1 unrouted)
LED+1  (1 unrouted)
N$2  (1 unrouted)
N$6  (1 unrouted)
N$7  (1 unrouted)
N$8  (1 unrouted)
N$9  (1 unrouted)
N$10  (1 unrouted)
N$11  (1 unrouted)
N$14  (1 unrouted)
N$15  (2 unrouted)
N$16  (2 unrouted)
N$17  (2 unrouted)
N$18  (2 unrouted)
N$19  (1 unrouted)
N$20  (1 unrouted)
N$21  (1 unrouted)
N$22  (1 unrouted)
N$23  (1 unrouted)
N$24  (1 unrouted)
N$25  (1 unrouted)
N$26  (1 unrouted)
N$27  (1 unrouted)
N$28  (1 unrouted)
N$29  (1 unrouted)
N$30  (1 unrouted)
N$31  (1 unrouted)
N$32  (1 unrouted)
N$33  (1 unrouted)
N$34  (1 unrouted)
N$35  (via drill 0.33)
  Top 0.406: U1.6 26.77,18.69 v26.92,18.54
N$36  (1 unrouted)
N$37  (via drill 0.33)
  Top 0.406: U1.8 26.11,25.22 v26.67,25.78 | 24.91,28.7 R32.1 24.89,28.57 25.4,29.08 v25.78,29.08
N$38
  Top 0.406: U1.9 25.48,26.25 C19.1 R31.2
N$39  (via drill 0.33)
  Top 0.254: LED3.A v19.43,16.38
N$40
  Top 0.254: U2.3 14.28,13.03 14.1,13.21 14.1,15.88 14.61,16.38 LED3.C
N$41
  Top 0.406: U1.2 24.18,18.85 23.62,18.29 20.32,18.29 19.81,18.8 L6.2
N$42
  Top 0.406: U1.11 24.18,25.35 23.62,25.91 20.87,25.91 L6.1
N$43
  Top 0.254: 32.59,10.64 R33.2
  Top 0.305: U3.10 32.59,10.64
  Top 0.61: R33.2 32.88,9.03 C22.1
N$44
  Top 0.254: 34.47,10.64 R33.1 35.88,10.35
  Top 0.305: U3.1 34.47,10.64
N$46
  Top 0.254: 32.59,14.51 R34.2
  Top 0.305: U3.6 32.59,14.51
  Top 0.61: R34.2 32.88,16.12 C21.1
N$47
  Top 0.305: U3.9 31.24,12.06 30.48,11.3 L7.2
N$48
  Top 0.305: U3.7 31.24,13.08 30.48,13.84 L8.2
N$49  (via drill 0.33)
  Top 0.254: U3.2 36.2,12.06 | 36.2,12.06 36.45,12.32 36.45,12.83 36.2,13.08 U3.4 | v36.32,11.43 36.32,12.06 36.2,12.06
N$50
  pour Top (isolate 0.61): 33.02,13.97 34.04,13.97 34.04,11.18 33.02,11.18
  pour Top (isolate 0.61): 34.92,12.32 34.92,12.83 36.2,12.83 36.2,12.32
  pour Top (isolate 0.61): 23.62,20.83 23.62,23.37 26.67,23.37 26.67,20.83
R0  (2 unrouted)
R1  (2 unrouted)
R2  (2 unrouted)
R3  (2 unrouted)
R4  (2 unrouted)
R5  (2 unrouted)
R6  (2 unrouted)
R7  (2 unrouted)
S$1
  Top 0.254: 34.47,14.51 R34.1
  Top 0.305: U3.5 34.47,14.51
SCL  (2 unrouted)
SD_CLK  (1 unrouted)
SD_CMD  (1 unrouted)
SD_DAT_0  (1 unrouted)
SD_DAT_1  (1 unrouted)
SD_DAT_2  (1 unrouted)
SD_DAT_3  (1 unrouted)
SD_DET  (1 unrouted)
SDA  (2 unrouted)
SPI_CS  (1 unrouted)
SPI_FLASH_CS  (1 unrouted)
SPI_FLASH_MISO  (1 unrouted)
SPI_FLASH_MOSI  (1 unrouted)
SPI_FLASH_SCK  (1 unrouted)
SPI_MISO  (1 unrouted)
SPI_MOSI  (1 unrouted)
SPI_SCK  (1 unrouted)
TCK/SWDCLK  (3 unrouted)
TDI  (3 unrouted)
TDO/SWO  (3 unrouted)
TMS/SWDIO  (3 unrouted)
TRST  (1 unrouted)
USB_D+  (3 unrouted)
USB_D-  (2 unrouted)
V+1  (via drill 0.33)
  Top 0.406: v16.26,13.03 U2.4
  Top 0.61: J1.1 15.49,5.91 16.29,6.71 16.29,13 v16.26,13.03

## Text on the board
tNames: Ryan Mamone 2013